# Altium PCB F4Test2.PcbDoc
Units mil, origin at the board's own origin, x right, y up, seen from the top; angles counter-clockwise.
Board outline 1775.03 x 1153.53 mil, 2 copper layers (Top Layer, Bottom Layer), stack 8.8 mil thick; 82 components, 82 nets, 330 pads, 130 vias.
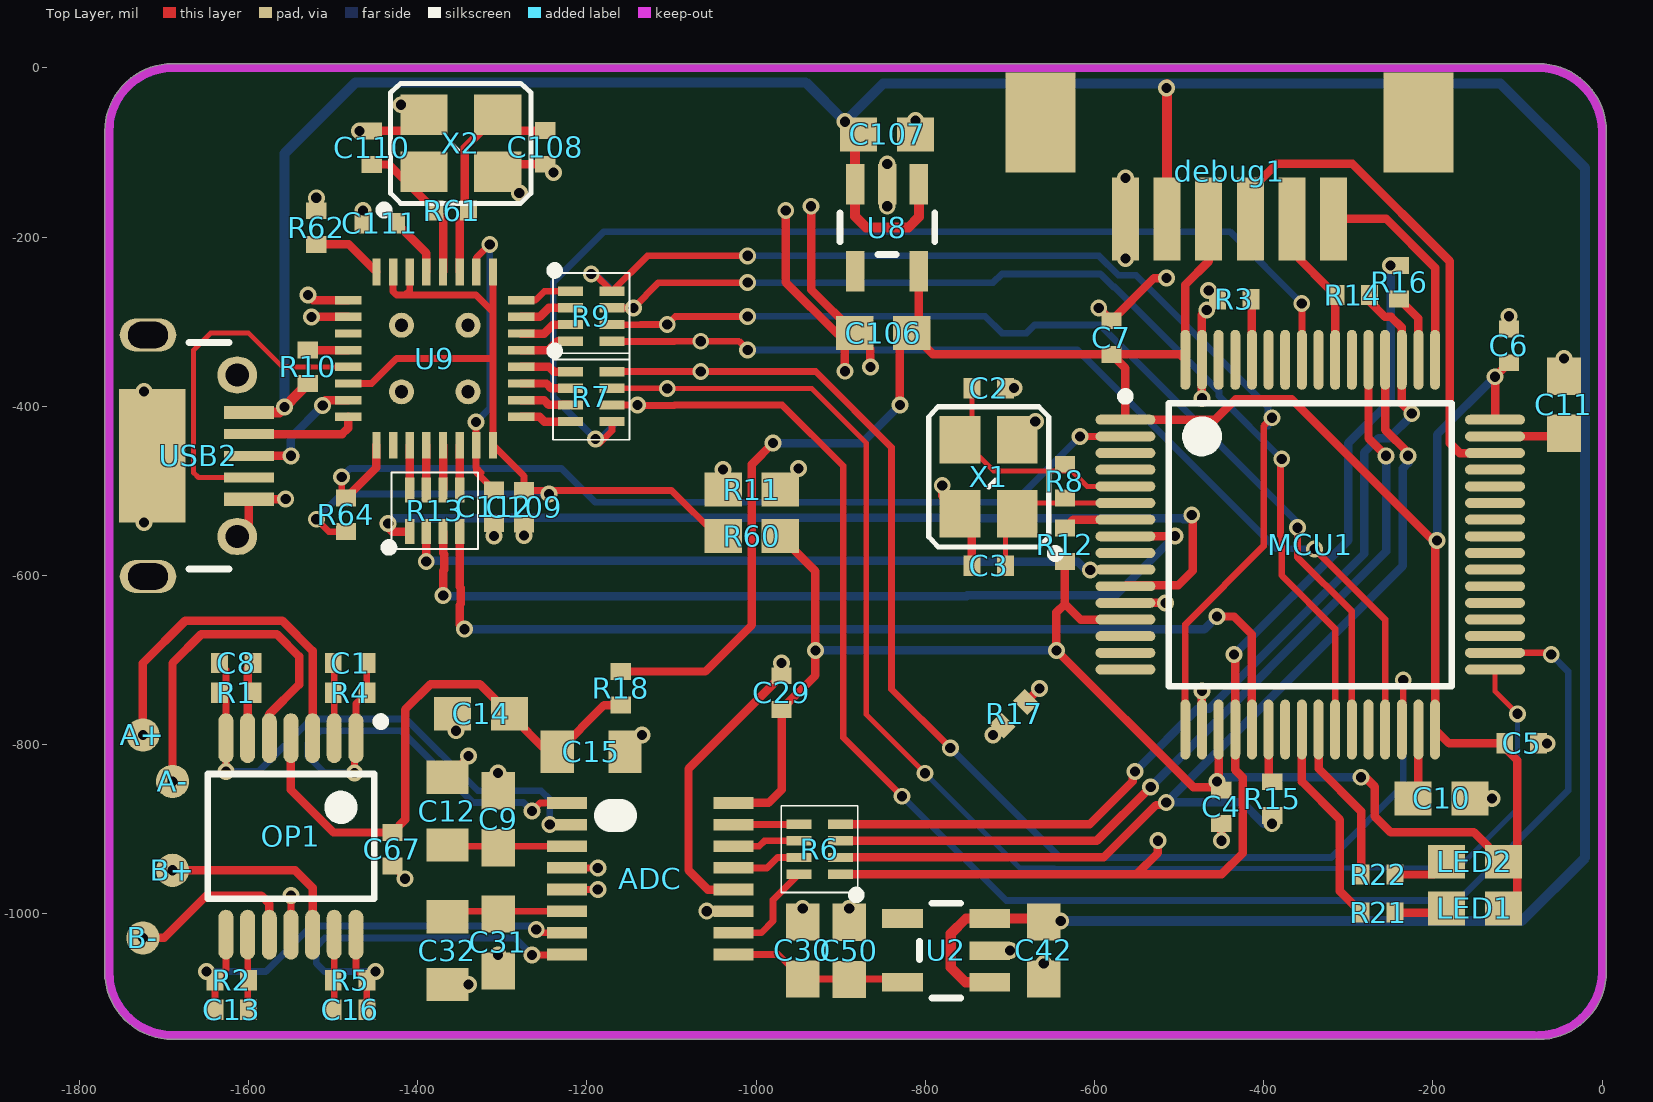
[diagram p0: Top Layer view]
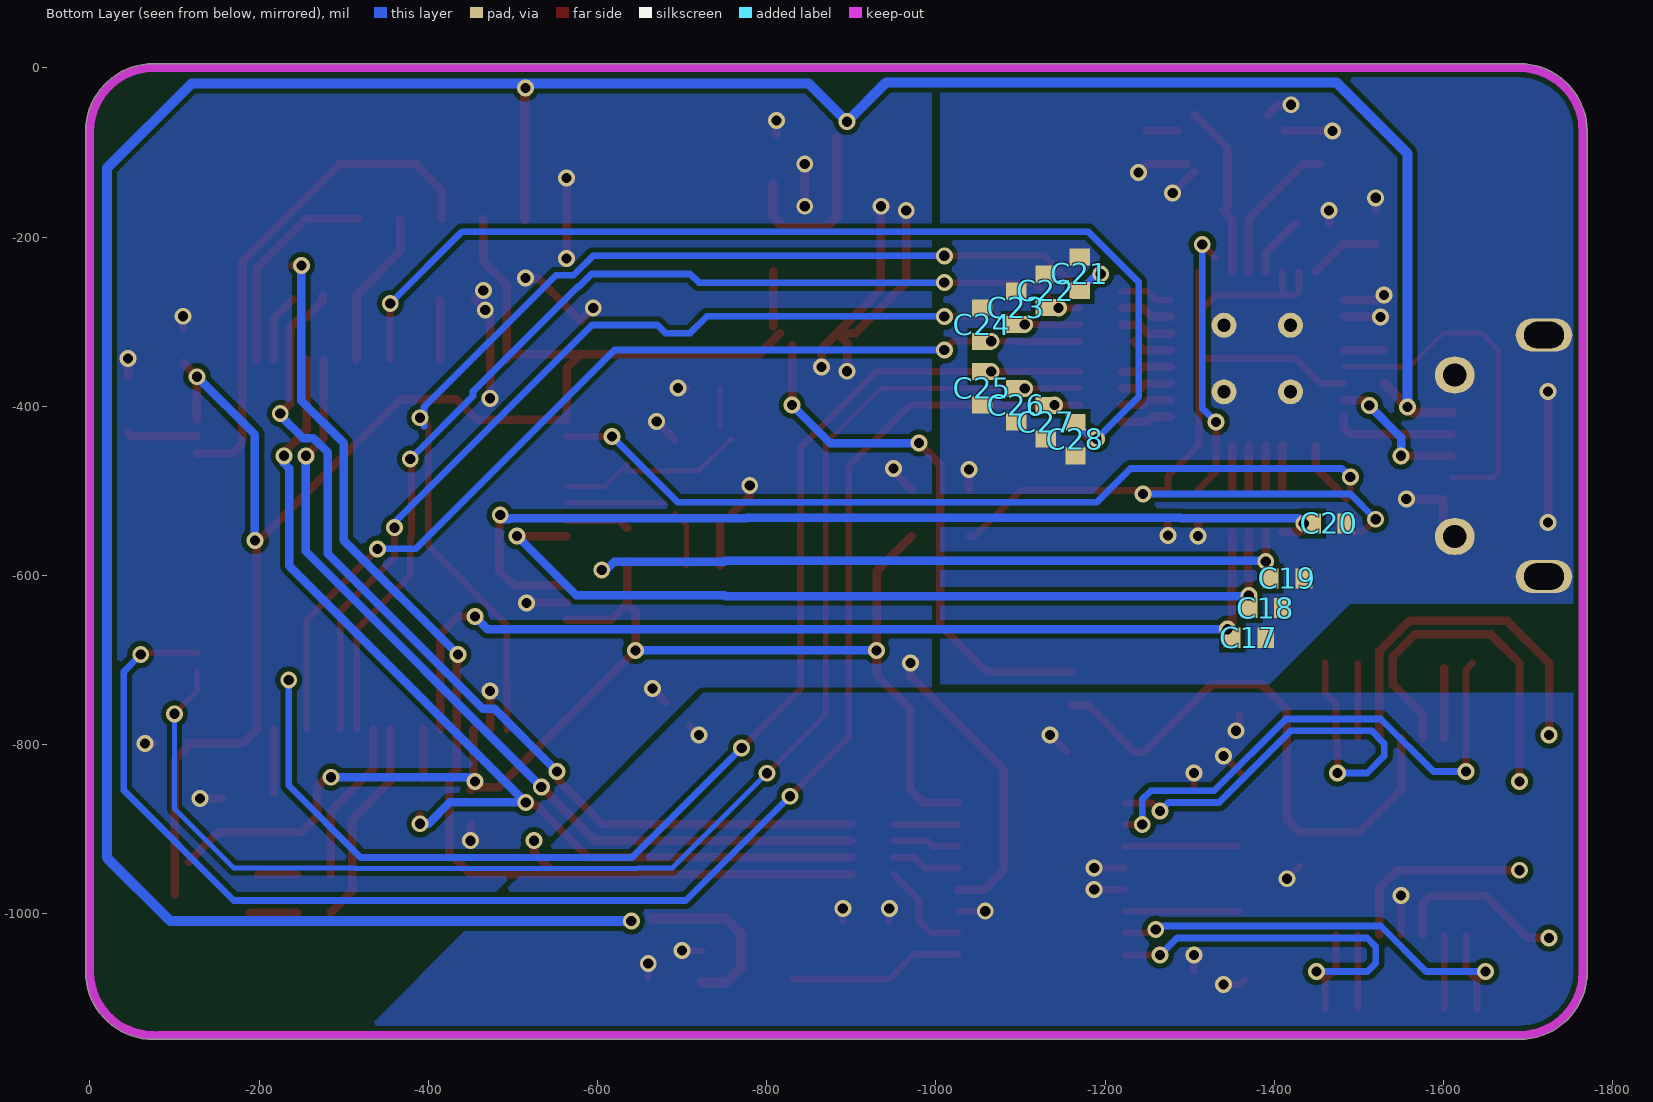
[diagram p1: Bottom Layer view, seen from below]

## Layer stack, top to bottom
Top Solder: solder mask 0.4, Solder Resist, Dk 3.5
Top Layer: signal copper 1.4
Dielectric 1: core 6, FR-4, Dk 4.2
Bottom Layer: signal copper 1.4
Bottom Solder: solder mask 0.4, Solder Resist, Dk 3.5

## Board outline
-1770.02,-1075 -1770.02,-1071.75 cw(c-1765,-1071.75) -1770.01,-1071.68 -1770.01,-75 -1770.02,-75 ccw(c-1765,-75) -1770.01,-75.1 -1770.02,-75 cw(c-1690,-75) -1690,5.02 cw(c-1690,0) -1689.93,5.02 -75,5.02 cw(c-75,-75) 5.02,-75 5.02,-1068.5 cw(c-75,-1068.5) -75,-1148.52 cw(c-75,-1143.5) -77.5,-1147.85 cw(c-80,-1143.5) -80,-1148.52 -1690,-1148.52 cw(c-1690,-1068.5) -1769.55,-1077.11 cw(c-1765,-1075)

## Design rules (kind name [scope] priority, off if disabled: settings)
Clearance [All] p1: gap=6
DiffPairsRouting [All] p1: maxlimit=10 minlimit=10 mostfreqgap=10 toplayer_minwidth=6 toplayer_maxwidth=15 toplayer_prefwidth=15 bottomlayer_minwidth=6 bottomlayer_maxwidth=15 bottomlayer_prefwidth=15 maxuncoupledlength=500
MinimumSolderMaskSliver [All] p1 off: minsoldermaskwidth=10
PlaneConnect [All] p1: planeconnectstyle=Direct reliefexpansion=20 reliefentries=4 reliefconductorwidth=10 reliefairgap=10
PolygonConnect [All] p1: connectstyle=Direct reliefconductorwidth=10 reliefentries=4 polygonreliefangle="90 Angle" airgapwidth=10
RoomDefinition mcu3 [InComponentClass('mcu3')] p1 off: confinementstyle=ConfineIn formatcopy=TRUE lockcomponents=FALSE outline 245,-1913.5 1025,-1913.5 1025,-1263.5 245,-1263.5
RoomDefinition IF2 [InComponentClass('IF2')] p2 off: confinementstyle=ConfineIn formatcopy=TRUE lockcomponents=FALSE outline -4765,-5048.5 -2765,-5048.5 -2765,-4048.5 -4765,-4048.5
RoomDefinition USB_HS2 [InComponentClass('USB_HS2')] p3 off: confinementstyle=ConfineIn formatcopy=TRUE lockcomponents=FALSE outline 2325,-468.5 5135,-468.5 5135,1251.5 2325,1251.5
RoutingVias [All] p1: holewidth=12 width=20 viastyle="Through Hole" minholewidth=12 minwidth=20 maxholewidth=28 maxwidth=50
SilkToBoardRegionClearance [All] p1 off:
SilkToSilkClearance [All] p1 off: silktosilkclearance=10
SilkToSolderMaskClearance [IsPad] p1 off: minsilkscreentomaskgap=10 clearancetoexposedcopper=TRUE
SolderMaskExpansion [All] p1: expansion=4
UnpouredPolygon [All] p1: allowunpoured=FALSE
Width [All] p1: maxlimit=60 minlimit=6 preferedwidth=6
23 further rules are at their usual default settings.

## Classes and differential pairs
component class USB_HS2: C17 C18 C19 C20 C21 C22 C23 C24 C25 C26 C27 C28 C108 C109 C110 C111 C112 R7 R9 R10 R11 R13 R60 R61 R62 R64 U9 USB2 X2
component class mcu3: C2 C3 C4 C5 C6 C7 C10 C11 C106 C107 debug1 LED1 LED2 MCU1 R3 R8 R12 R21 R22 U8 X1
component class IF2: A+ A- ADC B+ B- C1 C8 C9 C12 C13 C14 C15 C16 C29 C30 C31 C32 C42 C50 C67 OP1 R1 R2 R4 R5 R6 R14 R15 R16 R17 R18 U2

## Components (designator, comment, footprint, x,y, rotation, side; value= is the part's Value field where it differs from the comment)
A+ "TestPad" "TestPad - 1mm" -1725,-788.5 r0 top
A- "TestPad" "TestPad - 1mm" -1690,-843.5 r0 top
ADC "AD7537" AD7357 -1125,-958.5 r0 top
B+ "TestPad" "TestPad - 1mm" -1690,-948.5 r0 top
B- "TestPad" "TestPad - 1mm" -1725,-1028.5 r180 top
C1 "NC" 0402 -1480,-703.5 r180 top
C2 "22pF" 0402 -725,-378.5 r0 top
C3 "22pF" 0402 -725,-588.5 r180 top
C4 "0.1uF * 6" 0402 -450,-873.5 r90 top
C5 "1n" 0402 -95,-798.5 r180 top
C6 "1n" 0402 -110,-328.5 r270 top
C7 "1n" 0402 -580,-318.5 r270 top
C8 "NC" 0402 -1615,-703.5 r0 top
C9 "NC" 0603 -1305,-888.5 r90 top
C10 "2.2uF" 0603 -190,-863.5 r0 top
C11 "2.2uF" 0603 -45,-398.5 r90 top
C12 "NC" 0805 -1365,-878.5 r90 top
C13 "NC" 0402 -1620,-1113.5 r0 top
C14 "NC" 0603 -1325,-763.5 r180 top
C15 "NC" 0805 -1195,-808.5 r0 top
C16 "NC" 0402 -1480,-1113.5 r180 top
C17 "10pF/NC" 0402 -1370,-673.5 r180 bottom
C18 "1n" 0402 -1390,-638.5 r180 bottom
C19 "1n" 0402 -1415,-603.5 r180 bottom
C20 "1n" 0402 -1465,-538.5 r180 bottom
C21 "10pF/NC" 0402 -1170,-243.5 r90 bottom
C22 "1n" 0402 -1130,-263.5 r90 bottom
C23 "1n" 0402 -1095,-283.5 r90 bottom
C24 "1n" 0402 -1055,-303.5 r90 bottom
C25 "10pF/NC" 0402 -1055,-378.5 r270 bottom
C26 "1n" 0402 -1095,-398.5 r270 bottom
C27 "1n" 0402 -1130,-418.5 r270 bottom
C28 "1n" 0402 -1165,-438.5 r270 bottom
C29 "NC" 0402 -970,-738.5 r90 top
C30 "NC" 0603 -945,-1043.5 r90 top
C31 "NC" 0603 -1305,-1033.5 r270 top
C32 "NC" 0805 -1365,-1043.5 r270 top
C42 "4.7uF" 0603 -660,-1043.5 r90 top
C50 "4.7uF" 0603 -890,-1043.5 r270 top
C67 "0.1uF" 0402 -1430,-923.5 r270 top
C106 "4.7uF" 0603 -850,-313.5 r0 top
C107 "4.7uF" 0603 -845,-78.5 r180 top
C108 "10pF" 0402 -1249.37,-94.13 r90 top
C109 "1uF" 0402 -1274.37,-519.13 r270 top
C110 "10pF" 0402 -1454.37,-94.13 r270 top
C111 "1uF" 0402 -1445,-183.5 r180 top
C112 "1uF" 0402 -1310,-518.5 r270 top
debug1 "debug" WFRSM125 -465,-178.5 r180 top
LED1 "LED0" 0603 -150,-993.5 r180 top
LED2 "LED0" 0603 -150,-938.5 r180 top
MCU1 "STM32F103R8T6" LQFP64_N -345,-563.5 r0 top
OP1 "MCP6024" TSSOP14_44MM_065P -1550,-908.5 r270 top
R1 "10k" 0402 -1615,-738.5 r0 top
R2 "10k" 0402 -1620,-1078.5 r0 top
R3 "10k" 0402 -435,-273.5 r0 top
R4 "10k" 0402 -1480,-738.5 r180 top
R5 "10k" 0402 -1480,-1078.5 r180 top
R6 "Res*4" 0402X4 -925,-923.5 r180 top
R7 "Res*4" 0402X4 -1195,-388.5 r0 top
R8 "" 0402 -635,-488.5 r90 top
R9 "Res*4" 0402X4 -1195,-293.5 r0 top
R10 "10k" 0402 -1530,-353.5 r90 top
R11 "0R" 0603 -1005,-498.5 r180 top
R12 "10k" 0402 -635,-563.5 r270 top
R13 "Res*4" 0402X4 -1380,-523.5 r90 top
R14 "0R/FB" 0402 -295,-268.5 r0 top
R15 "0R/FB" 0402 -390,-863.5 r270 top
R16 "0R/FB" 0402 -240,-253.5 r90 top
R17 "0R/FB" 0402 -695,-763.5 r45 top
R18 "0R/FB" 0402 -1160,-733.5 r90 top
R21 "10k" 0402 -265,-998.5 r0 top
R22 "10k" 0402 -265,-953.5 r0 top
R60 "FB" 0603 -1005,-553.5 r180 top
R61 "1MR" 0402 -1360,-168.5 r0 top
R62 "12k 1%" 0402 -1520,-188.5 r270 top
R64 "10k" 0402 -1485,-528.5 r90 top
U2 "LP5907" SOT23-5 -775,-1043.5 r90 top
U8 "RT9193/RT9013/LP5907" SOT23-5 -845,-188.5 r180 top
U9 "USB3300_1" USB3300 -1380,-343.5 r0 top
USB2 "USB Micro Type B" MICRO-YZX -1830,-458.5 r270 top
X1 "8mhz" OSCILLATOR-3.2X2.5 -725,-483.5 r90 top
X2 "24mhz" OSCILLATOR-3.2X2.5 -1349.37,-89.13 r0 top

## Footprints (in the part's own frame and the unit in brackets; to place one, negate y for a bottom-side part, rotate by r counter-clockwise, add the part's x,y. Pads: shape width x height; smd on the part's side, far side on the other; paste and mask are expansions set on the pad)
0402 [mil] "0402-RES"
  rect 20x24 smd: 1(-19.68,0) 2(20,0)
0402X4 [mm]
  rect 0.75x0.28 smd: 1(-0.625,0.75) 2(-0.625,0.25) 3(-0.625,-0.25) 4(-0.625,-0.75) 5(0.625,-0.75) 6(0.625,-0.25) 7(0.625,0.25) 8(0.625,0.75)
  silkscreen extent -1.23,-1.3 1.15,1.5
0603 [mil] "0603-RES"
  rect 44x40 smd: 1(-33.46,0) 2(34,0)
0805 [mil]
  rect 39.37x50 smd: 1(-40,0) 2(40,0)
  body extent -50,-30 50,30, height 31
AD7357 [mm]
  rect 1.2x0.35 smd: 1(-2.5,2.275) 2(-2.5,1.625) 3(-2.5,0.975) 4(-2.5,0.325) 5(-2.5,-0.325) 6(-2.5,-0.975) 7(-2.5,-1.625) 8(-2.5,-2.275) 9(2.5,-2.275) 10(2.5,-1.625) 11(2.5,-0.975) 12(2.5,-0.325) 13(2.5,0.325) 14(2.5,0.975) 15(2.5,1.625) 16(2.5,2.275)
  silkscreen extent -1.2,1.9 -0.9,1.9, body extent -2.2,-2.5 2.2,2.5, height 1.2
LQFP64_N [mm]
  oval 1.8x0.3 smd: 1(-5.55,3.75) 2(-5.55,3.25) 3(-5.55,2.75) 4(-5.55,2.25) 5(-5.55,1.75) 6(-5.55,1.25) 7(-5.55,0.75) 8(-5.55,0.25) 9(-5.55,-0.25) 10(-5.55,-0.75) 11(-5.55,-1.25) 12(-5.55,-1.75) 13(-5.55,-2.25) 14(-5.55,-2.75) 15(-5.55,-3.25) 16(-5.55,-3.75) 33(5.55,-3.75) 34(5.55,-3.25) 35(5.55,-2.75) 36(5.55,-2.25) 37(5.55,-1.75) 38(5.55,-1.25) 39(5.55,-0.75) 40(5.55,-0.25) 41(5.55,0.25) 42(5.55,0.75) 43(5.55,1.25) 44(5.55,1.75) 45(5.55,2.25) 46(5.55,2.75) 47(5.55,3.25) 48(5.55,3.75)
  oval 0.3x1.8 smd: 17(-3.75,-5.55) 18(-3.25,-5.55) 19(-2.75,-5.55) 20(-2.25,-5.55) 21(-1.75,-5.55) 22(-1.25,-5.55) 23(-0.75,-5.55) 24(-0.25,-5.55) 25(0.25,-5.55) 26(0.75,-5.55) 27(1.25,-5.55) 28(1.75,-5.55) 29(2.25,-5.55) 30(2.75,-5.55) 31(3.25,-5.55) 32(3.75,-5.55) 49(3.75,5.55) 50(3.25,5.55) 51(2.75,5.55) 52(2.25,5.55) 53(1.75,5.55) 54(1.25,5.55) 55(0.75,5.55) 56(0.25,5.55) 57(-0.25,5.55) 58(-0.75,5.55) 59(-1.25,5.55) 60(-1.75,5.55) 61(-2.25,5.55) 62(-2.75,5.55) 63(-3.25,5.55) 64(-3.75,5.55)
  silkscreen extent -5.67,-4.25 4.25,4.57
MICRO-YZX [mm]
  rect 0.4x1.5 smd: 1(-1.3,5.85) 5(1.3,5.85)
  rect 0.3x1.5 smd: 2(-0.65,5.85) 3(0,5.85) 4(0.65,5.85)
  oval 1x1.7 hole 0.8 slot 1.2 at 90 deg: 5(-3.625,2.82) 5(3.625,2.82)
  oval 1.1x1.2 hole 0.7: 5(-2.425,5.5) 5(2.425,5.5)
  rect 4x2 smd: 5(0,2.95)
  silkscreen extent -3.4,4.05 3.4,5.25
OSCILLATOR-3.2X2.5 [mil] "OSCILLATOR-3.2X2.5"
  rect 56x48 smd: 1(-43.31,-33.46) 2(44,-33.46) 3(44,34) 4(-43.31,34)
  silkscreen extent -95,-83 83,71
SOT23-5 [mil] "SOT23-5"
  rect 22x48 smd: 1(-37.4,-51.19) 2(0,-51.19) 3(38,-51.19) 4(38,52) 5(-37.4,52)
  silkscreen extent -56,-17 56,32
"TestPad - 1mm" [mm]
  round 1 smd: 1(0,0)
TSSOP14_44MM_065P [mm]
  oval 1.5x0.45 smd: 1(-2.95,1.95) 2(-2.95,1.3) 3(-2.95,0.65) 4(-2.95,0) 5(-2.95,-0.65) 6(-2.95,-1.3) 7(-2.95,-1.95) 8(2.95,-1.95) 9(2.95,-1.3) 10(2.95,-0.65) 11(2.95,0) 12(2.95,0.65) 13(2.95,1.3) 14(2.95,1.95)
  silkscreen extent -3.57,-2.5 1.88,2.83
USB3300 [mm]
  round 0.75 hole 0.4: 0(-1,-1) 0(-1,1) 0(1,-1) 0(1,1)
  rect 0.8x0.25 smd: 1(-2.6,1.75) 2(-2.6,1.25) 3(-2.6,0.75) 4(-2.6,0.25) 5(-2.6,-0.25) 6(-2.6,-0.75) 7(-2.6,-1.25) 8(-2.6,-1.75) 17(2.6,-1.75) 18(2.6,-1.25) 19(2.6,-0.75) 20(2.6,-0.25) 21(2.6,0.25) 22(2.6,0.75) 23(2.6,1.25) 24(2.6,1.75)
  rect 0.25x0.8 smd: 9(-1.75,-2.6) 10(-1.25,-2.6) 11(-0.75,-2.6) 12(-0.25,-2.6) 13(0.25,-2.6) 14(0.75,-2.6) 15(1.25,-2.6) 16(1.75,-2.6) 25(1.75,2.6) 26(1.25,2.6) 27(0.75,2.6) 28(0.25,2.6) 29(-0.25,2.6) 30(-0.75,2.6) 31(-1.25,2.6) 32(-1.75,2.6)
  body extent -2.5,-2.5 2.5,2.5, height 0.85
WFRSM125 [mm]
  rect 0.81x2.5 smd: 1(-3.75,0) 2(-2.5,0) 3(-1.25,0) 4(0,0) 5(1.25,0) 6(2.5,0)
  rect 2.1x3 smd: shell(-6.3,-2.9) shell(5.05,-2.9)
  body extent -6.79,-3.82 5.46,0.38, height 3.4

## Part data
C1 C2 C3 C4 C5 C6 C7 C8 C9 C10 C11 C12 C13 C14 C15 C16 C17 C18 C19 C20 C21 C22 C23 C24 C25 C26 C27 C28 C29 C30 C31 C32 C67 C108 C109 C110 C111 C112: library part CAP0402-CAP, "<b>Capacitor</b> / Standard 0603 ceramic capacitor, and 0.1\" leaded capacitor."
C42 C50 C106 C107: library part Cap, "Capacitor"
LED1 LED2: "Typical INFRARED GaAs LED"
MCU1: "STM32 ARM-based 32-bit MCU with 64 Kbytes Flash, 64-pin LQFP, Industrial Temperature"
OP1: library part OP-SOP14
R1 R2 R3 R4 R5 R8 R10 R11 R12 R14 R15 R16 R17 R18 R21 R22 R60 R61 R62 R64: library part Res2, "Resistor"
R6 R7 R9 R13: "Resistor"
U8: library part LP5907
USB2: library part USB_Micro_TypeB, "Connector SMD USB Micro Type B middle mount"
X1 X2: library part OSCILLATOR-3.2X2.5, "Crystal Oscillator in 3.2x2.5 SMD"

## Via types
v1: diameter 20, hole 12, Top Layer to Bottom Layer, 130 vias

## Nets (pads, with @x,y where several pads share a name; then routed paths per layer and width w, separated by ;. In a path a pad name is that pad's centre, name@x,y a point inside that pad or via, vN(x,y) a via of type N, cw(c..) or ccw(c..) an arc to the next point about the centre after c; other vN are vias at no path point)
2.5A: ADC.9 C30.1 C50.2 U2.5 | length 207.6
  Top Layer w8: ADC.9 -973.9,-1048.07 C30.1 U2.5@-830.94,-1076.97
3.3A: C14.1 C15.1 C67.1 OP1.4 R18.1 | length 677
  Top Layer w10: OP1.4 -1550,-853.5 -1499.68,-903.82 C67.1 -1415,-888.82 -1415,-758.5 -1385,-728.5 -1326.54,-728.5 C14.1 -1246.54,-808.5 C15.1 -1179.68,-753.19 R18.1
3.3D: ADC.16 C4.2 C5.2 C6.2 C7.2 C29.1 C106.2 debug1.4 LED1.1 LED2.1 MCU1.1 MCU1.13 MCU1.19 MCU1.32 MCU1.48 MCU1.64 R12.2 R18.2 R60.1 U8.5 | length 4155.1
  Top Layer w10: R18.2 -1060,-713.5 -1005,-658.5 -1005,-468.5 v1(-980,-443.5) ; ADC.16 -985.43,-868.94 -970,-853.5 C29.1 -930,-718.19 v1(-930,-688.5) -930,-595.04 R60.1 ; v1(-830,-398.5) C106.2@-830,-327.5 ; C106.2 -791,-338.5 C7.2 ; C106.2@-807.6,-305.1 U8.5 ; R12.2 -635,-633.5 ; MCU1.13 -616.42,-652.09 -635,-633.5 ; debug1.4 -465,-228.5 -492.64,-256.14 MCU1.64 -499.13,-338.5 C7.2 ; v1(-455,-843.5) -455,-848.5 C4.2@-453.27,-850.24 ; MCU1.19 C4.2@-453.27,-850.24 ; C4.2 C4.2@-453.27,-850.24 ; v1(-285,-838.5) -280,-838.5 -268.69,-849.82 -268.69,-884.82 -250,-903.5 -151.54,-903.5 LED2.1 ; MCU1.48 v1(-126.5,-365) C6.2 ; LED1.1@-100,-976.97 -100,-818.5 -115,-803.5 C5.2 -180.87,-798.5 MCU1.32 -197.36,-561.14 -367.07,-391.43 -432.93,-391.43 -457.36,-415.87 MCU1.1 -563.5,-355 C7.2 ; -635,-633.5 -645,-643.5 v1(-645,-688.5) -483.27,-850.24 C4.2@-453.27,-850.24
  Bottom Layer w10: v1(-980,-443.5) -875,-443.5 v1(-830,-398.5) ; v1(-930,-688.5) v1(-645,-688.5) ; v1(-455,-843.5) -450,-838.5 v1(-285,-838.5) ; v1(-195,-558.78) -195,-433.5 v1(-126.5,-365)
3.3PHY: C109.1 R60.2 R64.1 U9.6 U9.16 U9.25 U9.30 U9.31 | length 1224.2
  Top Layer w8: v1(-1520,-533.5) -1505.32,-548.19 R64.1 ; U9.6 -1454.53,-373.03 -1425,-343.5 -1311.1,-343.5 ; U9.31 -1429.21,-264.29 -1425,-268.5 -1415,-268.5 ; U9.30 -1409.53,-263.03 -1415,-268.5 ; U9.25 -1311.1,-288.5 ; R60.2 -1046,-553.5 -1100.06,-499.45 C109.1 -1274.37,-482.6 U9.16 -1311.1,-343.5 ; -1415,-268.5 -1331.1,-268.5 -1311.1,-288.5 ; -1311.1,-343.5 -1311.1,-288.5
  Bottom Layer w8: v1(-1520,-533.5) -1490,-503.5 v1(-1245,-503.5)
5V: C42.2 C107.2 debug1.5 R10.1 U2.1 U2.3 U8.1 U8.3 USB2.1 | length 4100
  Top Layer w12: USB2.1@-1609.68,-407.32 -1563.82,-407.32 v1(-1557.5,-401) -1549.13,-392.64 -1549.13,-392.32 R10.1 ; C107.2@-883,-82.5 U8.3 -883,-175.5 -870,-188.5 -820,-188.5 -807.6,-176.1 U8.1 ; U2.1 -752.6,-1080.91 -770,-1063.5 -770,-1023.5 -752,-1005.5 U2.3 C42.2@-664,-1005.5 ; v1(-515,-23.5) -515,-20.08 -514.21,-19.29 debug1.5
  Bottom Layer w12: v1(-1557.5,-401) -1557.5,-101 -1473.5,-17 -941.5,-17 v1(-895,-63.5) -850,-18.5 -120,-18.5 -20,-118.5 -20,-933.5 -95,-1008.5 v1(-640,-1008.5)
AGND: ADC.4 ADC.5 ADC.11 C9.2 C12.2 C14.2 C15.2 C30.2 C31.2 C32.2 C42.1 C50.1 C67.2 OP1.11 R17.1 U2.2 | length 414.5
  Top Layer w8: OP1.11 v1(-1550,-978.5) ; C67.2 v1(-1415,-958.5) ; C32.2@-1365,-1078.5 -1360,-1083.5 v1(-1340,-1083.5) ; C12.2 v1(-1340,-813.5) ; C14.2 -1359,-779.5 v1(-1355,-783.5) ; C31.2 v1(-1305,-1048.5) ; C9.2 v1(-1305,-833.5) ; ADC.5 v1(-1187.2,-971.3) ; ADC.4 v1(-1187.2,-945.71) ; C15.2 v1(-1135,-788.5) ; v1(-1058.39,-996.89) ADC.11 ; C30.2 v1(-945,-993.5) ; C50.1 v1(-890,-993.5) ; U2.2 v1(-700,-1043.5) ; v1(-720,-788.5) R17.1 ; C42.1 v1(-660,-1058.5)
GND: ADC.12 C2.2 C3.2 C4.1 C5.1 C6.1 C7.1 C10.2 C11.2 C29.2 C106.1 C107.1 debug1.6 MCU1.12 MCU1.18 MCU1.63 R3.1 R11.1 R17.2 U8.2 X1.2 X1.4 | length 1593.8
  Top Layer w10: ADC.12 -1057.2,-971.3 -1080,-948.5 -1080,-828.5 C29.2 v1(-970,-703.5) ; R11.1 -950,-476.97 v1(-950,-473.5) ; v1(-965,-168.5) -965,-253.5 -905,-313.5 C106.1 ; v1(-935,-163.5) -935,-261.97 C106.1 ; v1(-895,-358.5) -895,-325.04 C106.1 ; v1(-865,-353.5) -865,-331.97 C106.1 ; v1(-845,-163.5) U8.2 v1(-845,-113.5) ; C107.1 v1(-811.54,-61.97) ; v1(-780,-493.5) -780,-505.81 X1.4 ; C3.2 X1.4@-745,-540.81 ; C2.2 v1(-695,-378.5) ; X1.2 v1(-670,-417.97) ; R17.2 v1(-665,-733.5) ; v1(-595,-283.82) C7.1 -529.69,-248.5 v1(-515,-248.5) ; MCU1.12 v1(-516.1,-632.4) ; v1(-563.43,-225.08) debug1.6 v1(-563.43,-130.08) ; MCU1.18 v1(-472.95,-736.46) ; v1(-472.95,-390.55) MCU1.63 -472.95,-291.77 v1(-467.34,-286.16) R3.1 v1(-465,-263.19) ; v1(-450,-913.5) C4.1 ; C10.2 v1(-130,-863.5) ; C6.1 v1(-110,-293.5) ; C5.1 v1(-65,-798.5) ; C11.2 v1(-45,-343.5)
GND_PHY: C17.2 C18.2 C19.2 C20.2 C21.2 C22.2 C23.2 C24.2 C25.2 C26.2 C27.2 C28.2 C108.1 C109.2 C110.1 C111.2 C112.2 R11.2 R62.1 U9.0 U9.1 U9.2 USB2.5 X2.2 X2.4 | length 591.7
  Top Layer w10: v1(-1723.86,-537.36) v1(-1723.86,-382.36) ; USB2.5@-1599.68,-540.2 -1599.68,-509.69 v1(-1556.18,-509.69) ; v1(-1530,-268.5) -1523.9,-274.61 U9.1 ; v1(-1525.79,-294.29) U9.2 ; R62.1 v1(-1520,-153.5) ; v1(-1469.06,-74.45) C110.1 X2.4@-1411.99,-74.45 ; C111.2 v1(-1465,-168.5) ; v1(-1420,-43.5) -1404.31,-43.5 X2.4 ; v1(-1310,-553.5) C112.2 ; X2.2 v1(-1280,-147.97) ; X2.2@-1296.59,-113.82 C108.1 v1(-1239.68,-123.5) ; v1(-1274.37,-552.87) C109.2 ; R11.2 v1(-1039,-474.5)
NetA+_1: A+.1 OP1.3 | length 424.3
  Top Layer w10: v1(-1725,-788.5) -1725,-703.5 -1675,-653.5 -1560,-653.5 -1524.41,-689.1 OP1.3
NetA-_1: A-.1 OP1.5 | length 425.7
  Top Layer w10: v1(-1690,-843.5) -1690,-703.5 -1656,-669.5 -1566.63,-669.5 -1540.41,-695.72 -1540.41,-728.91 -1575.59,-764.1 OP1.5
NetADC_1: ADC.1 C1.1 OP1.1 R4.1 | length 570.5
  Top Layer w8: v1(-1475,-833.5) -1475,-794.13 OP1.1 -1473.23,-751.42 R4.1 C1.1 ; v1(-1265,-878.5) -1255.43,-868.94 ADC.1
  Bottom Layer w8: v1(-1475,-833.5) -1510,-833.5 -1530,-813.5 -1530,-798.5 -1515,-783.5 -1420,-783.5 -1335,-868.5 -1275,-868.5 v1(-1265,-878.5)
NetADC_2: ADC.2 C8.1 OP1.7 R1.1 | length 629.9
  Top Layer w8: C8.1 -1626.77,-711.42 OP1.7 v1(-1626.77,-831.73) ; v1(-1243.98,-894.53) ADC.2
  Bottom Layer w8: v1(-1626.77,-831.73) -1588.23,-831.73 -1526,-769.5 -1414,-769.5 -1329,-854.5 -1254.2,-854.5 -1243.98,-864.73 v1(-1243.98,-894.53)
NetADC_3: ADC.3 C9.1 C12.1 | length 133.2
  Top Layer w8: C12.1@-1356.61,-920.12 ADC.3
NetADC_6: ADC.6 C31.1 C32.1 | length 135
  Top Layer w8: C32.1@-1358.39,-996.89 ADC.6
NetADC_7: ADC.7 C13.1 OP1.8 R2.1 | length 559.3
  Top Layer w8: v1(-1650,-1068.19) R2.1 ; C13.1 R2.1 ; OP1.8 -1626.77,-1065.59 R2.1 ; v1(-1260,-1018.5) -1256.02,-1022.48 ADC.7
  Bottom Layer w8: v1(-1650,-1068.19) -1579.68,-1068.19 -1526,-1014.5 v1@-1260,-1014.5
NetADC_8: ADC.8 C16.1 OP1.14 R5.1 | length 511.4
  Top Layer w8: OP1.14 -1473.23,-1065.59 R5.1 ; C16.1 R5.1 ; v1(-1450,-1068.19) R5.1 ; v1(-1265,-1048.5) ADC.8@-1223.86,-1048.5
  Bottom Layer w8: v1(-1450,-1068.19) -1510.32,-1068.19 -1520,-1058.5 -1520,-1038.5 -1510,-1028.5 -1285,-1028.5 v1(-1265,-1048.5)
NetADC_10: ADC.10 R6.8 | length 120.4
  Top Layer w8: ADC.10 -993.98,-1022.48 -980,-1008.5 -980,-983.43 R6.8
NetADC_13: ADC.13 R6.7 | length 82.1
  Top Layer w8: ADC.13 -987.2,-945.71 -974.84,-933.35 R6.7
NetADC_14: ADC.14 R6.6 | length 79.6
  Top Layer w8: ADC.14 -996.61,-920.12 -990.16,-913.66 R6.6
NetADC_15: ADC.15 R6.5 | length 76.4
  Top Layer w8: ADC.15 R6.5@-950.16,-894.53
NetB+_1: B+.1 OP1.12 | length 229.7
  Top Layer w10: v1(-1690,-948.5) -1545,-948.5 -1524.41,-969.09 OP1.12
NetB-_1: B-.1 OP1.10 | length 210.7
  Top Layer w10: v1(-1725,-1028.5) -1700,-1028.5 -1650,-978.5 -1585,-978.5 -1575.59,-987.91 OP1.10
NetC1_2: C1.2 OP1.2 R4.2 | length 87.7
  Top Layer w8: OP1.2 C1.2@-1498.82,-704.69
NetC2_1: C2.1 MCU1.5 R8.2 X1.3 | length 276.3
  Top Layer w6: X1.3 -756.26,-439.5 -719.26,-476.5 -635,-476.5 R8.2 -608.9,-494.61 MCU1.5 ; X1.3@-744.68,-425.19 C2.1
NetC3_1: C3.1 MCU1.6 R8.1 X1.1 | length 182.9
  Top Layer w6: C3.1 -705.32,-540.59 X1.1 ; X1.1@-679.02,-514.29 MCU1.6
NetC8_2: C8.2 OP1.6 R1.2 | length 82.7
  Top Layer w10: OP1.6 C8.2@-1601.18,-709.69
NetC10_1: C10.1 MCU1.31 | length 75.1
  Top Layer w10: C10.1@-217.05,-857.09 MCU1.31
NetC11_1: C11.1 MCU1.47 | length 83
  Top Layer w10: MCU1.47 -48.58,-435.55 C11.1
NetC13_2: C13.2 OP1.9 R2.2 | length 87.7
  Top Layer w8: C13.2@-1601.18,-1112.32 OP1.9
NetC16_2: C16.2 OP1.13 R5.2 | length 87.7
  Top Layer w8: C16.2@-1498.82,-1112.32 OP1.13
NetC17_1: C17.1 MCU1.21 R13.4 | length 1177.3
  Top Layer w10: R13.4 -1350.47,-613.33 -1349,-614.81 -1349,-633.68 -1350.47,-635.15 -1350.47,-658.03 v1(-1345,-663.5) ; v1(-455,-648.5) -435,-648.5 -413.9,-669.61 MCU1.21
  Bottom Layer w10: v1(-1345,-663.5) -470,-663.5 v1(-455,-648.5)
NetC18_1: C18.1 MCU1.8 R13.3 | length 1030
  Top Layer w10: R13.3 -1370.16,-573.65 -1369,-574.81 -1369,-593.36 -1370,-594.36 v1(-1370,-623.5) ; MCU1.8@-563.35,-553.5 v1(-505,-553.5)
  Bottom Layer w10: v1(-1370,-623.5) -1370,-624.5 -751.3,-624.5 -750.3,-623.5 -575,-623.5 v1(-505,-553.5)
NetC19_1: C19.1 MCU1.10 R13.2 | length 826.1
  Top Layer w10: v1(-1390,-583.5) -1390,-548.27 R13.2 ; v1(-605,-593.5) v1@-604.53,-593.03
  Bottom Layer w10: v1(-1390,-583.5) -1389,-582.5 -751.3,-582.5 -750.3,-583.5 -620,-583.5 -610,-593.5 v1(-605,-593.5)
NetC20_1: C20.1 MCU1.11 R13.1 | length 1146.6
  Top Layer w10: v1(-1435,-538.5) -1440,-538.5 -1430.39,-548.11 R13.1 ; MCU1.11@-562.19,-611.4 -500.9,-611.4 -484,-594.5 -484,-529.5 v1(-485,-528.5)
  Bottom Layer w10: v1(-1435,-538.5) -1429,-532.5 -1289.7,-532.5 -1289.07,-531.87 -800.39,-531.87 -800.33,-531.81 -776.3,-531.81 -775.61,-532.5 -496.3,-532.5 -495.3,-533.5 -490,-533.5 v1(-485,-528.5)
NetC21_1: C21.1 MCU1.17 R9.8 | length 1374.2
  Top Layer w8: v1(-1195,-243.5) -1190.87,-243.5 R9.8 -1128.47,-222.06 v1(-1010,-222.06) ; MCU1.17 -492.95,-782.01 -492.95,-728.17 -492.64,-727.86 -492.64,-657.86 -400,-565.22 -400,-423.5 v1(-390,-413.5)
  Bottom Layer w8: v1(-1195,-243.5) -1189.68,-243.5 C21.1 ; v1(-1010,-222.06) -594.73,-222.06 -571.71,-245.08 -550.81,-245.08 -395,-400.89 v1@-395,-418.5 ; -395,-423.5 v1@-395,-418.5 ; v1(-390,-413.5) v1@-395,-418.5
NetC22_1: C22.1 MCU1.26 R9.7 | length 1249.4
  Top Layer w8: R9.7 v1(-1145.16,-283.66) -1115.31,-253.82 v1(-1010,-253.82) ; v1(-378.65,-462.16) -380,-463.5 -380,-553.13 -378.65,-554.48 -378.65,-599.85 -315.47,-663.03 MCU1.26
  Bottom Layer w8: v1(-1010,-253.82) -719.81,-253.82 -709.5,-243.5 -593.08,-243.5 -577.51,-259.08 -576.14,-259.08 -452.95,-382.27 -452.95,-387.86 v1(-378.65,-462.16)
NetC23_1: C23.1 MCU1.27 R9.6 | length 1197.7
  Top Layer w8: R9.6 -1170.39,-303.66 -1136.87,-303.66 -1136.56,-303.35 v1(-1105.16,-303.35) -1095.63,-293.82 v1(-1010,-293.82) ; v1(-360,-543.5) -360,-578.5 -295.79,-642.72 MCU1.27
  Bottom Layer w8: v1(-1010,-293.82) -1009.69,-293.5 -729.5,-293.5 -709.5,-313.5 -680.5,-313.5 -670.82,-303.82 -593.56,-303.82 -356.94,-540.44 v1(-360,-543.5)
NetC24_1: C24.1 MCU1.29 R9.5 | length 1180.6
  Top Layer w8: R9.5 -1170.39,-323.35 -1096.87,-323.35 -1096.56,-323.03 v1(-1065.47,-323.03) -1020.47,-323.03 v1(-1010,-333.5) ; v1(-340,-568.5) -256.42,-652.09 MCU1.29
  Bottom Layer w8: v1(-1010,-333.5) -620,-333.5 -385,-568.5 v1(-340,-568.5)
NetC25_1: C25.1 MCU1.30 R7.8 | length 1557.9
  Top Layer w8: R7.8 v1(-1065.47,-358.98) -929.53,-358.98 -840,-448.5 -840,-734.45 v1(-770.47,-803.98) ; MCU1.30@-235,-780.28 v1(-235,-723.5)
  Bottom Layer w8: v1(-770.47,-803.98) -640.94,-933.5 -320,-933.5 -235,-848.5 v1(-235,-723.5)
NetC26_1: C26.1 MCU1.33 R7.7 | length 1698.9
  Top Layer w6: R7.7 -1105.16,-378.66 v1(-1105.16,-378.98) -934.21,-378.98 -869.84,-443.35 -869.84,-764.29 v1(-800.31,-833.82) ; MCU1.33 -126.5,-737.01 v1(-100,-763.5)
  Bottom Layer w6: v1(-1105.16,-378.98) C26.1@-1105,-378.82 ; v1(-800.31,-833.82) -688.43,-945.71 -647.13,-945.71 -646.33,-946.5 -314.62,-946.5 -313.82,-945.71 -170,-945.71 -100,-875.71 v1(-100,-763.5)
NetC27_1: C27.1 MCU1.34 R7.6 | length 1848.8
  Top Layer w8: R7.6 v1(-1140.16,-398.35) -1139.53,-398.98 -1096.87,-398.98 -1096.24,-398.35 -969.21,-398.35 -897.03,-470.53 -897.03,-791.48 v1(-827.5,-861) ; MCU1.34 v1@-62.05,-691.46
  Bottom Layer w8: v1(-827.5,-861) -704.35,-984.15 -170,-984.15 -40,-854.15 -40,-713.5 v1(-60,-693.5)
NetC28_1: C28.1 MCU1.57 R7.5 | length 1289.1
  Top Layer w8: v1(-1190,-438.5) -1185,-443.5 -1170.39,-428.9 R7.5 ; v1(-355,-278.5) -354.84,-278.66 MCU1.57
  Bottom Layer w8: C28.1 -1184.68,-438.5 v1(-1190,-438.5) -1240,-388.5 -1240,-253.5 -1180,-193.5 -440,-193.5 v1(-355,-278.5)
NetC108_2: C108.2 R61.2 U9.27 X2.3 | length 245.4
  Top Layer w10: U9.27 -1350.47,-178.98 R61.2 -1344.37,-164.13 -1344.37,-94.04 -1305.46,-55.13 X2.3 ; X2.3@-1286.37,-74.13 C108.2
NetC110_2: C110.2 R61.1 U9.28 X2.1 | length 173.8
  Top Layer w10: C110.2 -1434.06,-114.13 R61.1 -1370.16,-178.03 U9.28
NetC111_1: C111.1 U9.29 | length 72.3
  Top Layer w10: C111.1 -1389.84,-218.98 U9.29
NetC112_1: C112.1 U9.15 U9.26 | length 368.4
  Top Layer w8: v1(-1331.1,-418.5) -1331.1,-472.4 -1325,-478.5 ; U9.15 -1330.79,-478.03 ; -1330.79,-224.29 v1(-1315,-208.5) ; -1325.47,-478.03 -1330.79,-478.03 ; C112.1 -1330.79,-478.03
  Bottom Layer w8: v1(-1331.1,-418.5) -1315,-402.4 v1(-1315,-208.5)
Netdebug1_1: debug1.1 MCU1.49 | length 252.7
  Top Layer w10: debug1.1 -255,-178.5 -197.36,-236.14 MCU1.49
Netdebug1_2: debug1.2 MCU1.55 R14.1 | length 187.7
  Top Layer w10: debug1.2 -366.57,-216.93 -315.47,-268.03 MCU1.55
Netdebug1_3: debug1.3 MCU1.46 | length 603.8
  Top Layer w10: debug1.3 -415.79,-144.29 -385,-113.5 -295,-113.5 -180,-228.5 -180,-443.5 -168.27,-455.24 MCU1.46
NetLED1_2: LED1.2 R21.2 | length 56
  Top Layer w10: R21.2 LED1.2@-189,-998.5
NetLED2_2: LED2.2 R22.2 | length 46
  Top Layer w10: R22.2 LED2.2@-199,-953.5
NetMCU1_2: MCU1.2 R64.2 U9.9 | length 1084.2
  Top Layer w8: v1(-1490,-483.5) -1490,-503.5 R64.2 ; v1(-617.05,-435.55) MCU1.2
  Top Layer w10: R64.2 -1448.9,-472.4 U9.9
  Bottom Layer w8: v1(-1490,-483.5) -1480,-473.5 -1230,-473.5 -1190,-513.5 -695,-513.5 v1(-617.05,-435.55)
NetMCU1_7: MCU1.7 R12.1 | length 75.6
  Top Layer w10: R12.1 -625.16,-533.98 MCU1.7
NetMCU1_20: MCU1.20 R6.1 R16.2 | length 1319.2
  Top Layer w10: R6.1 -550,-953.03 ; v1(-525,-913.5) -525,-928.03 -550,-953.03 ; v1@-433.58,-694.92 MCU1.20 -433.58,-829.92 -425,-838.5 -425,-928.5 -449.53,-953.03 -550,-953.03 ; v1(-250,-233.5) R16.2
  Bottom Layer w10: v1(-435,-693.5) -300,-558.5 -300,-443.5 -250,-393.5 v1(-250,-233.5)
NetMCU1_22: MCU1.22 R15.1 | length 57.6
  Top Layer w10: R15.1@-394.21,-839.61 MCU1.22
NetMCU1_23: MCU1.23
NetMCU1_24: MCU1.24 R21.1 | length 245.6
  Top Layer w10: MCU1.24 -354.84,-843.66 -310,-888.5 -310,-973.19 R21.1
NetMCU1_25: MCU1.25 R22.1 | length 192.4
  Top Layer w10: MCU1.25 -335.16,-828.35 -284.69,-878.82 R22.1
NetMCU1_38: MCU1.38
NetMCU1_40: MCU1.40
NetMCU1_50: MCU1.50 R16.1 | length 81.3
  Top Layer w10: R16.1 -217.05,-296.14 MCU1.50
NetMCU1_51: MCU1.51 R6.4 R14.2 | length 1118.2
  Top Layer w10: R6.4 -605.47,-893.98 -555,-843.5 -555,-834.57 v1(-551.97,-831.54) ; R14.2 -275,-275.75 -256.56,-294.19 -249.31,-294.19 -236.73,-306.77 MCU1.51 -236.73,-396.77 v1(-225,-408.5)
  Bottom Layer w10: v1(-551.97,-831.54) -477.88,-757.46 -464.25,-757.46 -281.31,-574.52 -281.31,-454.81 -264.01,-437.5 -251.63,-437.5 -225,-410.87 v1(-225,-408.5)
NetMCU1_52: MCU1.52 R6.2 R15.2 | length 1210.7
  Top Layer w10: R6.2 -589.16,-933.35 -527.16,-871.34 -518.23,-871.34 v1(-515.2,-868.31) ; v1(-390,-893.5) R15.2 ; MCU1.52 -256.42,-427.7 -229.31,-454.81 v1(-229.31,-458.5)
  Bottom Layer w10: v1(-390,-893.5) -400,-893.5 -425.2,-868.31 v1(-515.2,-868.31) -235.63,-588.74 -235.63,-473.5 -229.31,-467.19 v1(-229.31,-458.5)
NetMCU1_53: MCU1.53 R6.3 | length 1022
  Top Layer w10: R6.3 -597.32,-913.66 v1(-533.58,-849.92) ; MCU1.53 -276.1,-437.72 v1(-255.31,-458.5)
  Bottom Layer w10: v1(-533.58,-849.92) -255.31,-571.66 v1(-255.31,-458.5)
NetMCU1_60: MCU1.60 R3.2 | length 70.4
  Top Layer w10: MCU1.60 R3.2@-413.9,-274.61
NetR7_1: R7.1 U9.20 | length 60.4
  Top Layer w10: U9.20 -1244.9,-353.35 -1239.27,-358.98 R7.1
NetR7_2: R7.2 U9.19 | length 60.4
  Top Layer w10: U9.19 -1247.84,-373.03 -1242.22,-378.66 R7.2
NetR7_3: R7.3 U9.18 | length 60.4
  Top Layer w10: U9.18 -1250.79,-392.72 -1245.16,-398.35 R7.3
NetR7_4: R7.4 U9.17 | length 60.4
  Top Layer w10: U9.17 -1256.1,-412.4 -1250.47,-418.03 R7.4
NetR9_1: R9.1 U9.24 | length 62.4
  Top Layer w8: U9.24 -1261.1,-274.61 -1250.47,-263.98 R9.1
NetR9_2: R9.2 U9.23 | length 62.4
  Top Layer w10: U9.23 -1255.79,-294.29 -1245.16,-283.66 R9.2
NetR9_3: R9.3 U9.22 | length 62.4
  Top Layer w10: U9.22 -1250.47,-313.98 -1239.84,-303.35 R9.3
NetR9_4: R9.4 U9.21 | length 47.5
  Top Layer w10: U9.21 -1245.16,-333.66 -1234.53,-323.03
NetR10_2: R10.2 U9.4 | length 47.5
  Top Layer w10: R10.2@-1529.84,-333.66 U9.4
NetR13_5: R13.5 U9.14 | length 53
  Top Layer w10: R13.5 U9.14
NetR13_6: R13.6 U9.13 | length 53
  Top Layer w10: R13.6 U9.13
NetR13_7: R13.7 U9.12 | length 53
  Top Layer w10: R13.7 U9.12
NetR13_8: R13.8 U9.11 | length 53
  Top Layer w10: R13.8 U9.11
NetR62_2: R62.2 U9.32 | length 84.6
  Top Layer w10: R62.2 -1481.54,-208.5 U9.32
NetU9_5: U9.5 USB2.4 | length 410.1
  Top Layer w6: USB2.4@-1609.68,-484.1 -1659.41,-484.1 -1665,-478.5 -1665,-333.5 -1645,-313.5 -1600,-313.5 -1560.16,-353.35 U9.5
NetU9_7: U9.7 USB2.3 | length 174.2
  Top Layer w10: USB2.3@-1609.68,-458.5 v1(-1550,-458.5) v1@-1545,-458.5 ; v1(-1512.45,-399.19) -1512.45,-395.95 -1509.21,-392.72 U9.7
  Bottom Layer w10: v1(-1550,-458.5) -1550,-436.74 v1(-1512.45,-399.19)
NetU9_8: U9.8 USB2.2 | length 143.7
  Top Layer w10: USB2.2@-1609.68,-432.91 -1489.41,-432.91 -1482.36,-425.87 U9.8
pads on no net: debug1.shell MCU1.3 MCU1.4 MCU1.9 MCU1.14 MCU1.15 MCU1.16 MCU1.28 MCU1.35 MCU1.36 MCU1.37 MCU1.39 MCU1.41 MCU1.42 MCU1.43 MCU1.44 MCU1.45 MCU1.54 MCU1.56 MCU1.58 MCU1.59 MCU1.61 MCU1.62 U2.4 U8.4 U9.3 U9.10

## Polygon pours and split planes (outlines as drawn)
AGND on Bottom Layer "Bottom Layer-No Net" (solid, remove dead copper, pour order 2): -1765,-1333.5 -1765,-738.5 -725,-738.5 -130,-1333.5 -1765,-1333.5
GND on Bottom Layer "Bottom Layer-No Net" (solid, remove dead copper, pour order 5): -995,0 -995,-733.5 -720,-733.5 -310,-1143.5 0,-1143.5 0,0 -995,0
GND_PHY on Bottom Layer "Bottom Layer-No Net" (solid, pour order 7): -1770,-633.5 -1490,-633.5 -1395,-728.5 -1055,-728.5 -1005,-728.5 -1005,-678.5 -1005,0 -1765,0

## Keep-outs
Keep-Out Layer:
  lines w10: -1765,-1075 -1765,-1071.75 -1765,-75 cw(c-1690,-75) -1690,0 -75,0 cw(c-75,-75) 0,-75 0,-1068.5 cw(c-75,-1068.5) -75,-1143.5 ; -1765,-1068.5 ccw(c-1690,-1068.5) -1690,-1143.5 -80,-1143.5

## Text inside footprints (layer, text, board x,y; h text height)
R6: Mechanical 1 "R1" at -932.09,-915.66 h11.81 r270
R7: Mechanical 1 "R1" at -1187.91,-396.35 h11.81 r90
R9: Mechanical 1 "R1" at -1187.91,-301.35 h11.81 r90
R13: Mechanical 1 "R1" at -1372.16,-516.42 h11.81 r180